# Altium PCB PowerDC_5V.PcbDoc
Units mil, origin at the board's own origin, x right, y up, seen from the top; angles counter-clockwise.
Board outline 2165.35 x 3228.35 mil, 2 copper layers (Top Layer, Bottom Layer); 8 components, 5 nets, 21 pads, 0 vias.
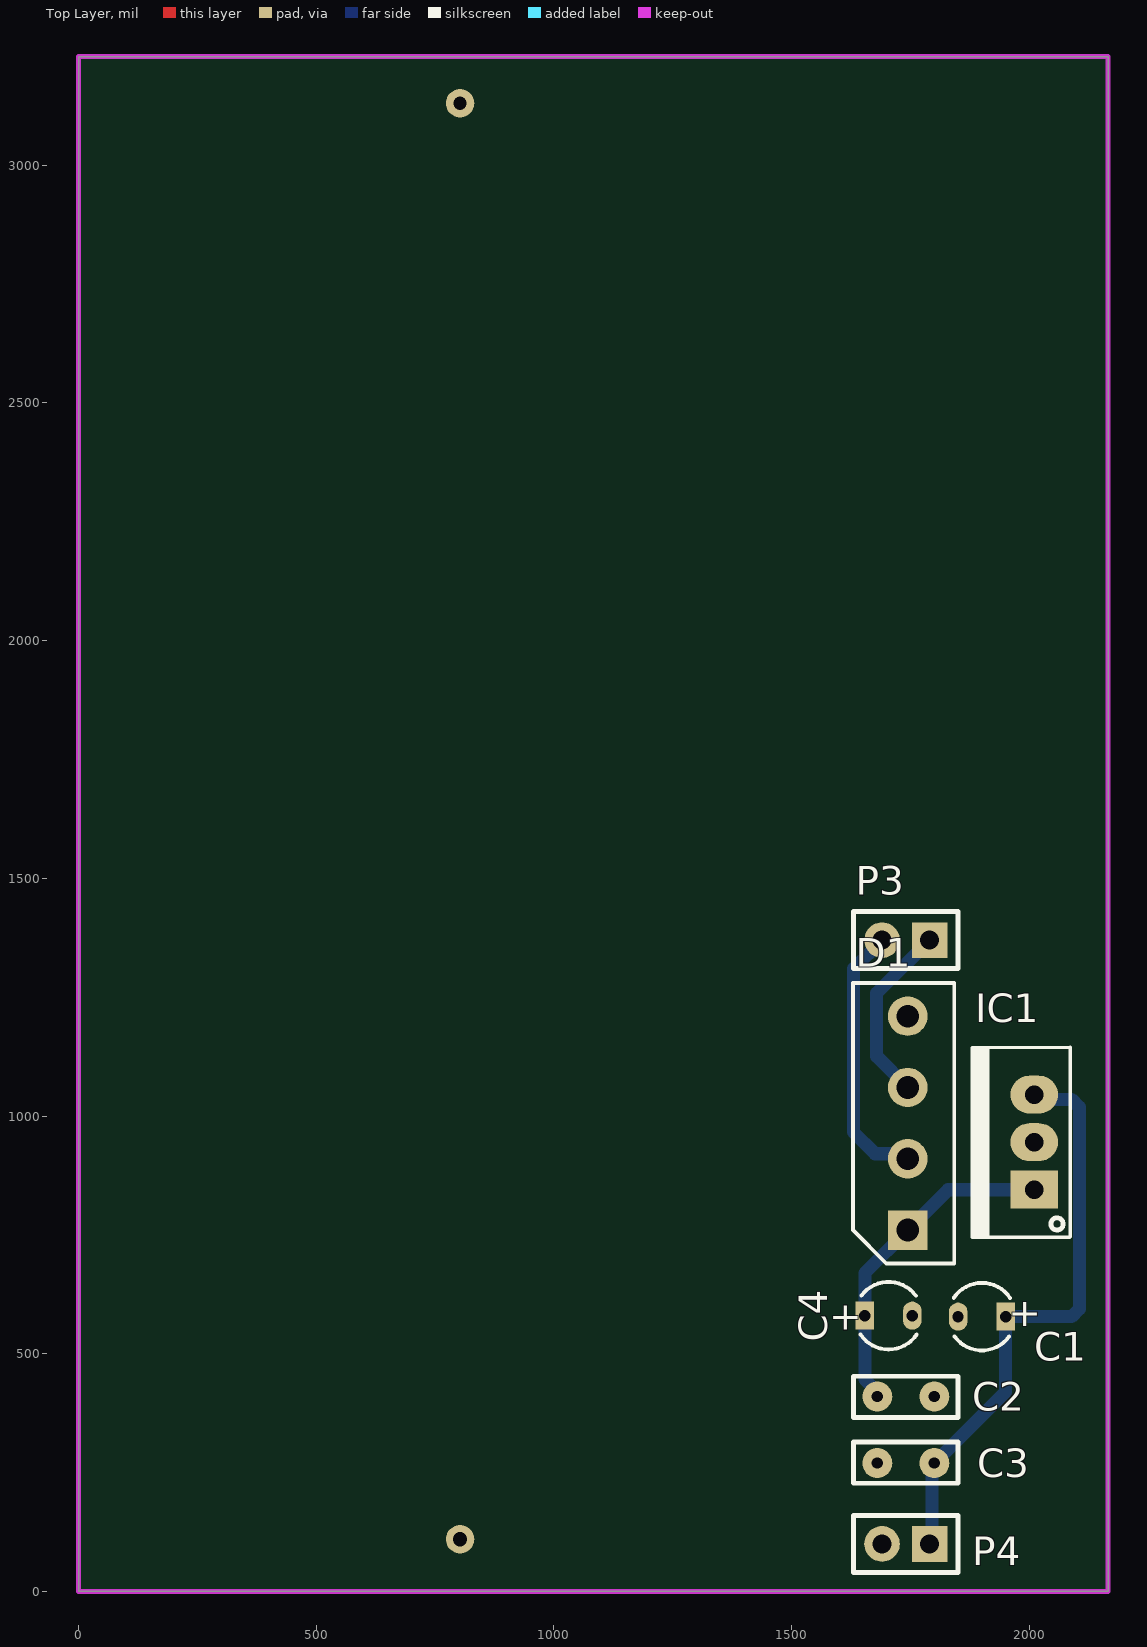
[diagram p0: Top Layer view]
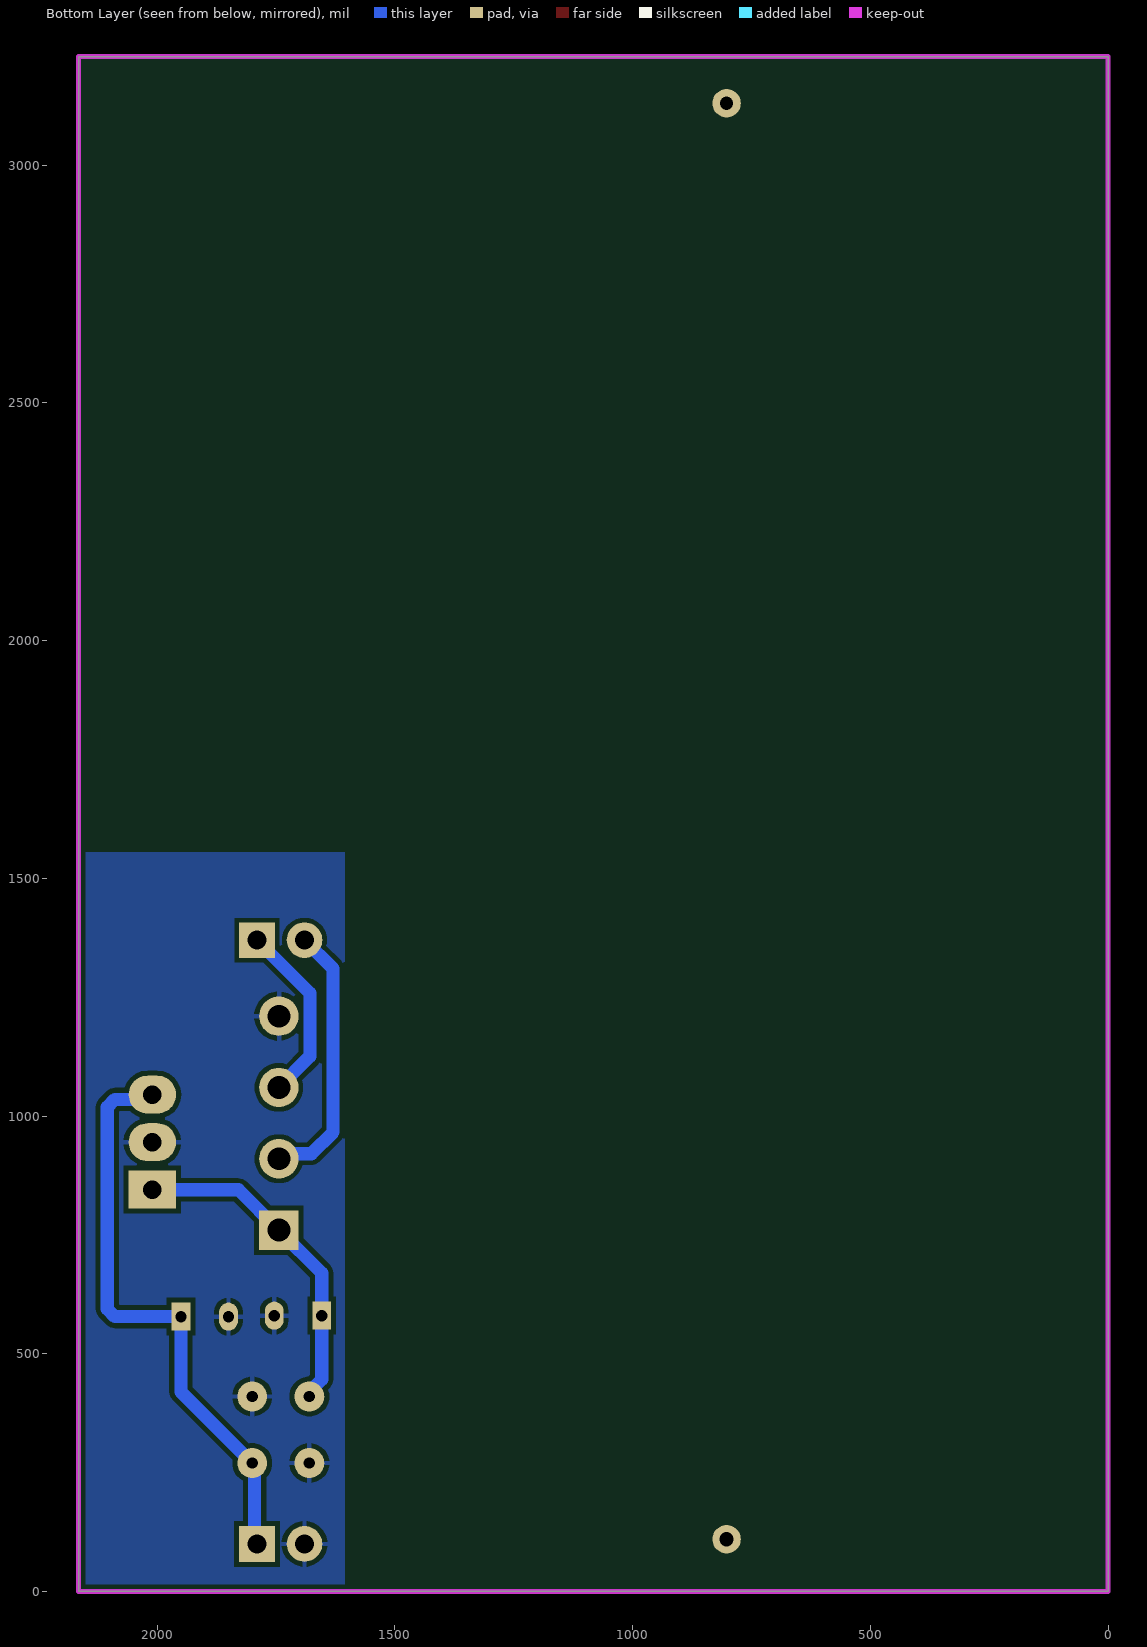
[diagram p1: Bottom Layer view, seen from below]
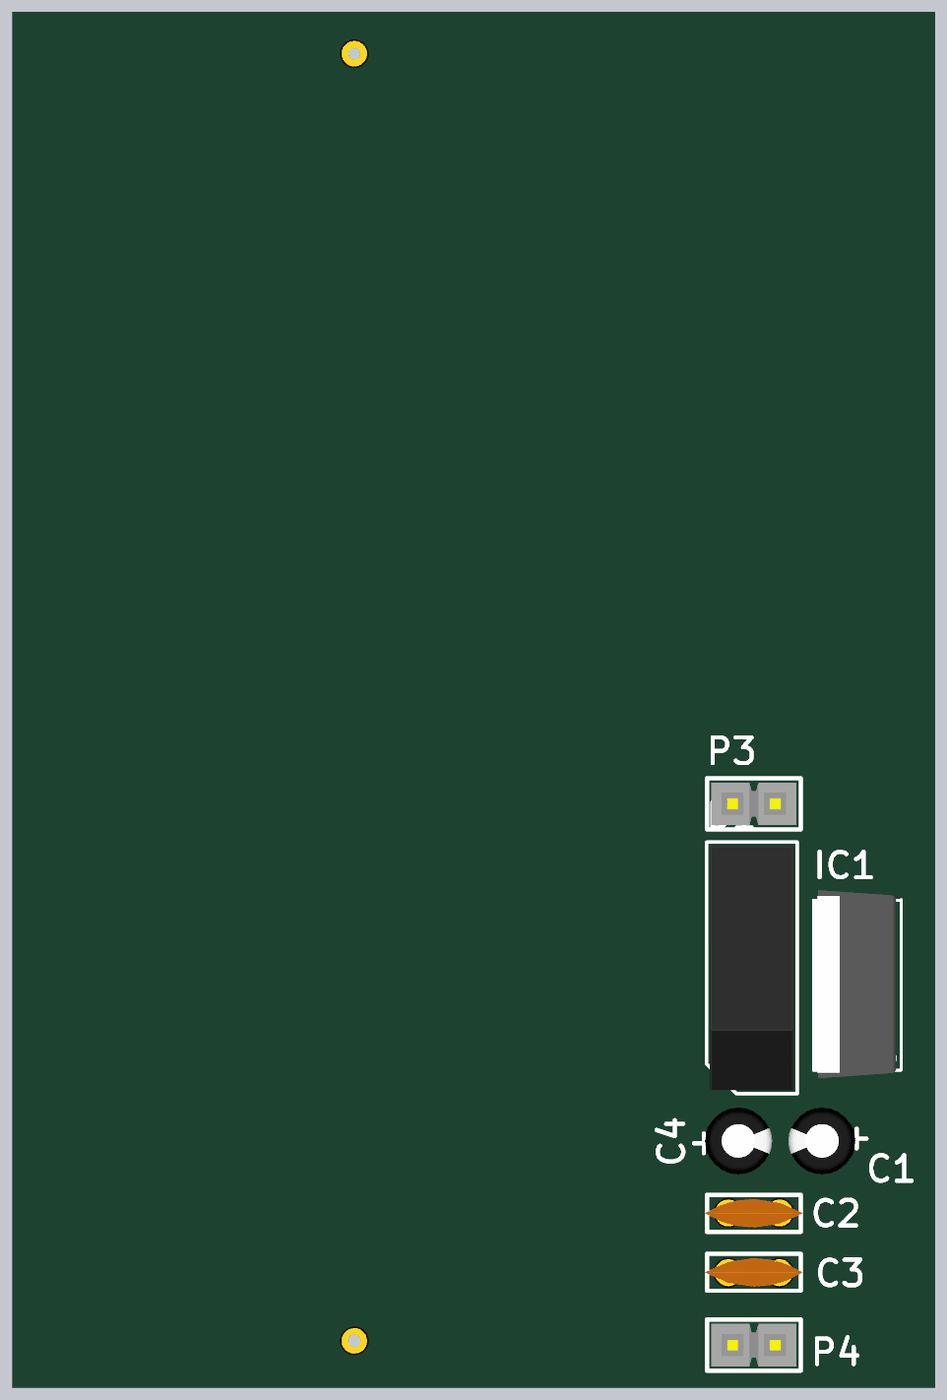
[diagram p2: 3D render of the assembled board from above, using the file's embedded part models]

## Layer stack, top to bottom
Top Solder: solder mask 0.4, Solder Resist, Dk 3.5
Top Layer: signal copper 1.4
Dielectric 1: dielectric 12.6, FR-4, Dk 4.8
Bottom Layer: signal copper 1.4
Bottom Solder: solder mask 0.4, Solder Resist, Dk 3.5

## Board outline
0,0 0,3228.35 2165.35,3228.35 2165.35,0

## Design rules (kind name [scope] priority, off if disabled: settings)
Clearance [All] p1: gap=10 ignorepadtopadclearanceinfootprint=FALSE except(0: Arc-Hole Track-Hole SMDPad-Hole THPad-Hole Via-Hole Fill-Hole Poly-Hole Region-Hole Text-Hole)
PolygonConnect [All] p1: connectstyle=Relief reliefconductorwidth=10 reliefentries=4 polygonreliefangle="90 Angle" airgapwidth=10
RoutingVias [All] p1: holewidth=28 width=50 viastyle="Through Hole" minholewidth=28 minwidth=50 maxholewidth=28 maxwidth=50
SolderMaskExpansion [All] p1: expansion=4 istentingtop=FALSE
Width [All] p1: maxlimit=27.56 minlimit=19.68 preferedwidth=27.56
30 further rules are at their usual default settings.

## Components (designator, comment, footprint, x,y, rotation, side; value= is the part's Value field where it differs from the comment)
C1 "Cap Pol1" CAP_POL_3MM 1900,578.01 r180 top value=100uF
C2 "100nF" "Cap Non Pol 3mm" 1798.98,409.13 r180 top
C3 "100nF" "Cap Non Pol 3mm" 1681.02,270.87 r0 top
C4 "Cap Pol1" CAP_POL_3MM 1703.73,580 r0 top value=100uF
D1 "Diode Bridge" "DIODE BRIDGE (1A)" 1743.94,760 r90 top
IC1 "LM7805" QTO-220 2010,845 r90 top
P3 "Header 2" "Header 2" 1790,1370 r180 top
P4 "Header 2" "Header 2" 1790,100 r180 top

## Footprints (in the part's own frame and the unit in brackets; to place one, negate y for a bottom-side part, rotate by r counter-clockwise, add the part's x,y. Pads: shape width x height; smd on the part's side, far side on the other; paste and mask are expansions set on the pad)
"Cap Non Pol 3mm" [mm] "d=3mm, pitch=0.1in"
  round 1.6 hole 0.6: 1(-0.026,-0.022) 2(3.022,-0.022)
  silkscreen extent -1.3,-1.1 4.29,1.1, body extent -1.42,-0.85 4.42,0.84, height 6.22
CAP_POL_3MM [mm]
  rect 1x1.5 hole 0.6: 1(-1.27,0)
  oval 1x1.5 hole 0.6: 2(1.27,0)
  silkscreen extent -1.5,-1.81 1.5,1.8, body extent -2,-2.03 1.99,1.97, height 7.01
"DIODE BRIDGE (1A)" [mil] "Diode Bridge 1A; Solder Pad 35mil"
  rect 83x83 hole 48: 1(0,0)
  round 83 hole 48: 2(150,0) 3(300,0) 4(450,0)
  silkscreen extent -70,-98 520,115, body extent -62,-90 512,107, height 453
"Header 2" [mil] "Connector; Header; 2 Position; Solder Pad 35mil"
  rect 75x75 hole 40: 1(0,0)
  round 75 hole 40: 2(100,0)
  silkscreen extent -60,-60 160,60, body extent -50,-50 150,50, height 330
QTO-220 [mil] "TO-220 - 1-2-3"
  rect 80x100 hole 39: 1(0,0)
  oval 80x100 hole 39: 2(100,0) 3(200,0)
  silkscreen extent -100,-76 300,130, body extent -119,-64 322,121, height 755

## Part data
C1 C4: "Polarized Capacitor (Radial)", LatestRevisionDate=17-Jul-2002, LatestRevisionNote="Re-released for DXP Platform.", PackageDescription="Polarized Capacitor (Radial); 2 Leads", PackageReference=RB7.6-15, Published=8-Jun-2000, Publisher="Altium Limited"
C2 C3: library part "Cap Non Pol", "Cap Nol Pol", Volt=16V
D1: "Full Wave Diode Bridge", LatestRevisionDate=17-Jul-2002, LatestRevisionNote="Re-released for DXP Platform.", PackageReference=D-38, Published=8-Jun-2000, Publisher="Altium Limited"
IC1: library part LM78xx, "On ap +, from + 5 to + 24VDC"
P3 P4: "Header, 2-Pin", LatestRevisionDate=17-Jul-2002, LatestRevisionNote="Re-released for DXP Platform.", Publisher="Altium Limited"

## Free pads (board coordinates)
  round 60 hole 27.56: 1(802.4,3130)
  round 60 hole 30: 2(802.4,110)

## Nets (pads, with @x,y where several pads share a name; then routed paths per layer and width w, separated by ;. In a path a pad name is that pad's centre, name@x,y a point inside that pad or via, vN(x,y) a via of type N, cw(c..) or ccw(c..) an arc to the next point about the centre after c; other vN are vias at no path point)
GND: C1.2 C2.1 C3.1 C4.2 D1.4 IC1.2 P4.2
NetC1_1: C1.1 C3.2 IC1.3 P4.1 | length 1236.5
  Bottom Layer w27.56: P4.1 1795,105 1795,265 C3.2 1950,420 C1.1 2088.86,578.01 2105,594.15 2105,1018.82 2088.86,1034.97 2020.03,1034.97 IC1.3
NetC2_2: C2.2 C4.1 D1.1 IC1.1 | length 699.5
  Bottom Layer w27.56: C2.2 1680,419.59 1653.73,445.86 C4.1 1653.73,669.8 D1.1 1828.94,845 IC1.1
NetD1_2: D1.2 P3.2 | length 565.9
  Bottom Layer w27.56: P3.2 1630,1310 1630,966.14 1675.54,920.61 1733.33,920.61 D1.2
NetD1_3: D1.3 P3.1 | length 383.2
  Bottom Layer w27.56: D1.3 1678.66,1125.28 1678.66,1258.66 P3.1

## Polygon pours and split planes (outlines as drawn)
GND on Bottom Layer "GND_L02_P002" (solid, remove dead copper, pour order 2): 2165,0 1605,0 1605,1555 2165,1555

## Keep-outs
Keep-Out Layer:
  the board outline again, w10

## Text inside footprints (layer, text, board x,y; h text height)
C1: Top Overlay "+" at 2025,608.01 h60 r180
C4: Top Overlay "+" at 1578.73,550 h60